# EAGLE board mouse_v6 (EAGLE 8.6.1)
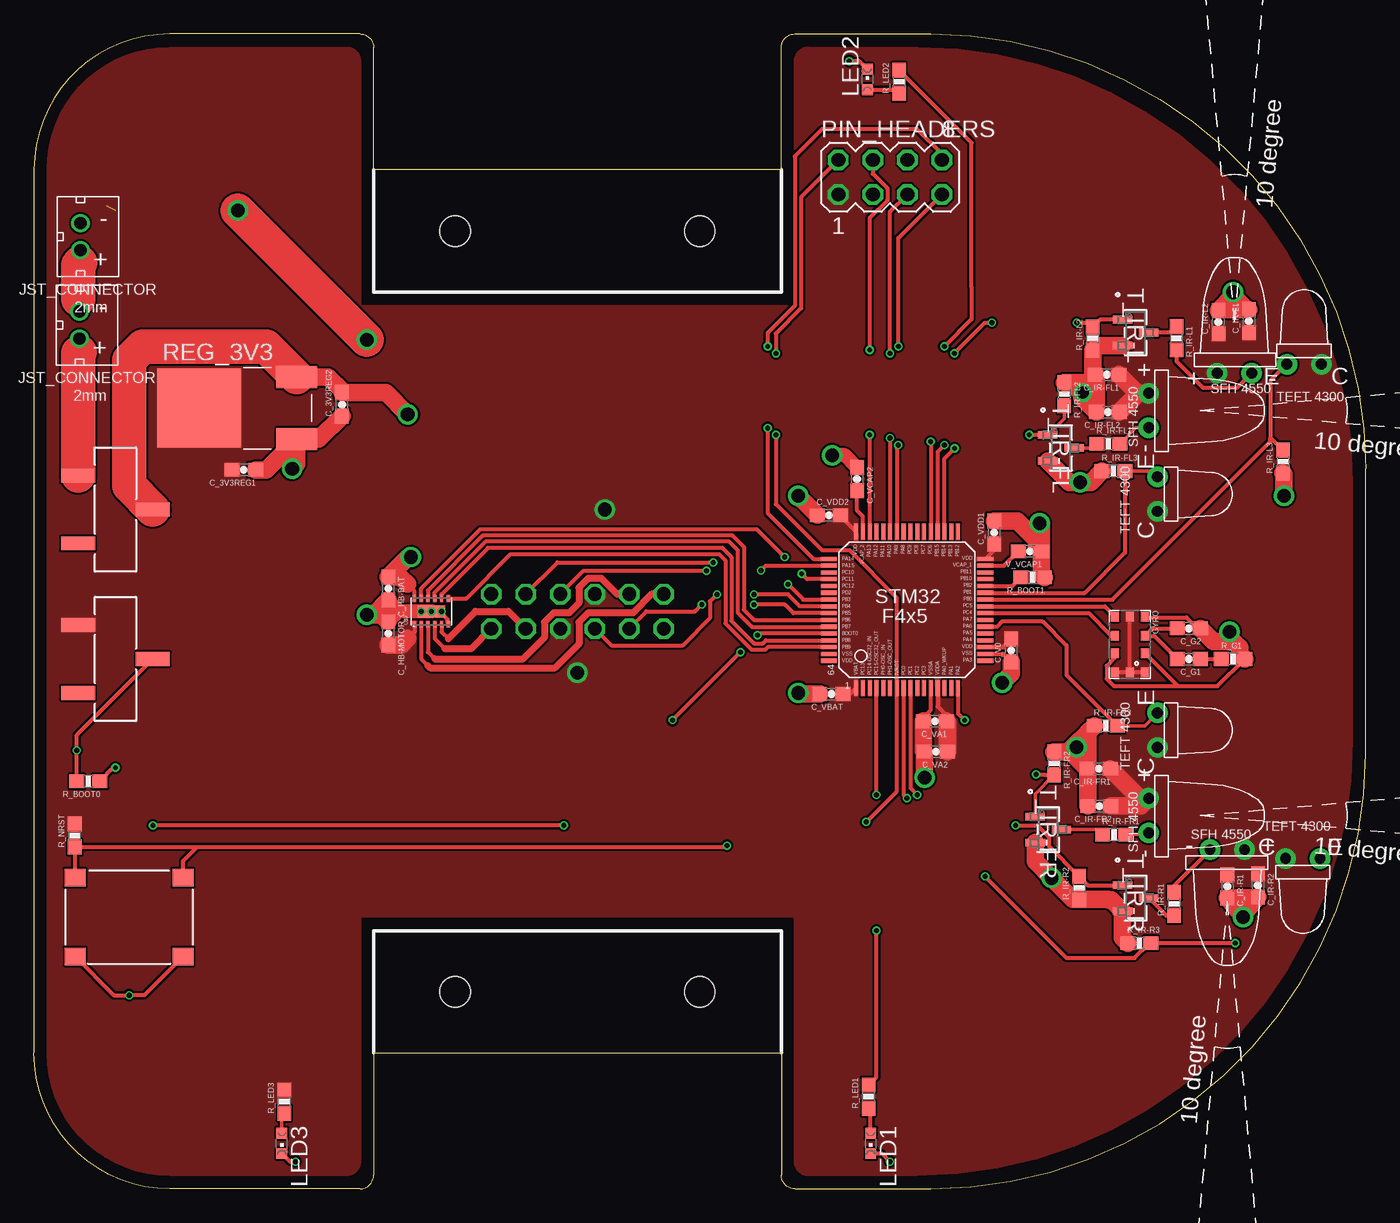
[diagram p0: board, top side]
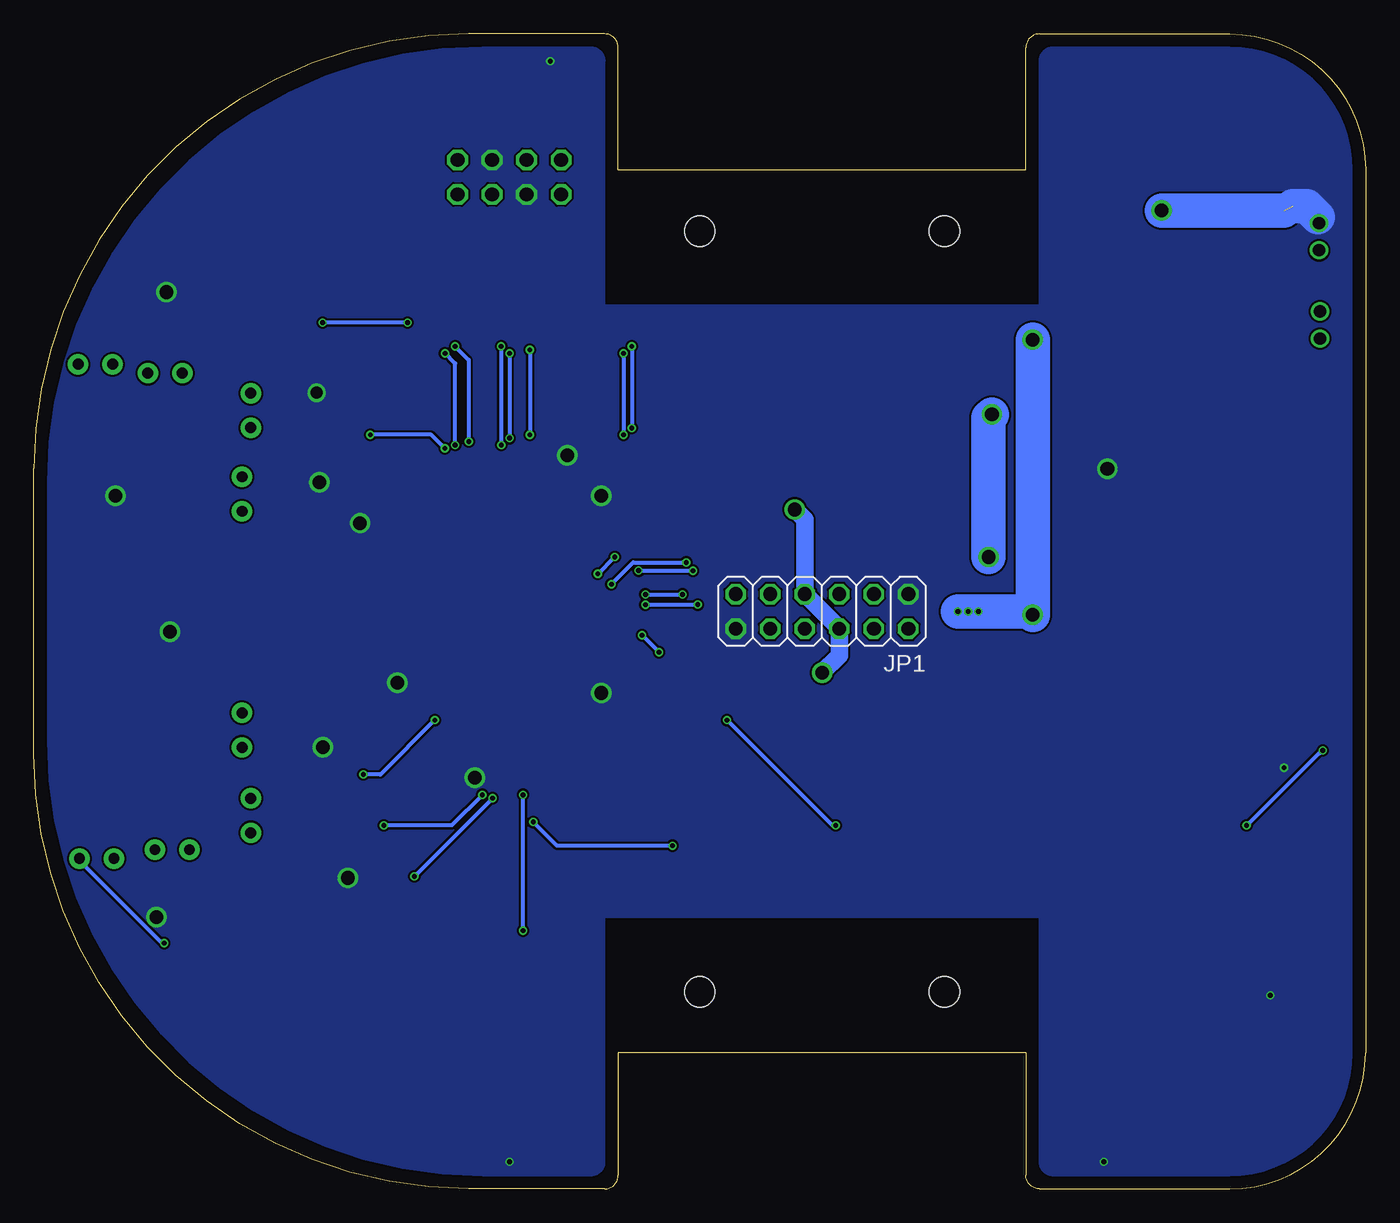
[diagram p1: board, bottom side, seen from below]

Size 98 x 85 mm. Coordinates in mm from the lower left corner, seen from the top.
Outline: 25,10 55,10 55,1 arc90 56,0 66,0 arc90 98,32 98,53 arc90 66,85 56,85 arc90 55,84 55,75 25,75 25,84 arc90 24,85 10,85 arc90 0,75 0,10 arc90 10,0 24,0 arc90 25,1 25,10
Copper layers (1*16): Top 0.035559375mm / dielectric 1.6mm / Bottom 0.035559375mm
Design rules "oshpark-2layer": minimum track width 6mil, minimum drill 10mil, track to track 6mil, track to pad 6mil, pad to pad 6mil, via to via 6mil, smd to smd 6mil, copper to edge 15mil, drill to drill 6mil, minimum pad ring 5mil, minimum via ring 5mil, stop-mask expansion 2.5mil, vias tented up to drill 0mil, thermal gap 10mil
Holes 2.25 mm at 31,14.5 49,14.5 49,70.5 31,70.5
tKeepout: area 25,66 to 55,75; area 25,10 to 55,19
bKeepout: area 25,10 to 55,19; area 25,66 to 55,75
tRestrict: area 25,10 to 55,19; area 25,66 to 55,75
bRestrict: area 25,10 to 55,19; area 25,66 to 55,75

## Footprints (pad centres in the part's own frame; a part is rotated, then mirrored left to right if it is on the bottom)
0603-CAP = smd 1.1 x 1: 1 -0.85,0; 2 0.85,0
10-TLGA = smd 0.7 x 0.6: 1 2.05,1.1; 2 0.635,1.1; 3 -0.635,1.1; 4 -2.05,1.1; 5 -2.05,0; 6 -2.05,-1.1; 7 -0.635,-1.1; 8 0.635,-1.1; 9 2.05,-1.1; 10 2.05,0
EMITTER = drill 0.8 pad 1.5: + -1.27,-0.5; - 1.27,-0.5
2X06 = drill 1.016 octagon: 1 -6.35,-1.27; 2 -6.35,1.27; 3 -3.81,-1.27; 4 -3.81,1.27; 5 -1.27,-1.27; 6 -1.27,1.27; 7 1.27,-1.27; 8 1.27,1.27; 9 3.81,-1.27; 10 3.81,1.27; 11 6.35,-1.27; 12 6.35,1.27
CHIPLED_0603 = smd 0.8 x 0.8: A 0,-0.75; C 0,0.75
MA04-2 = drill 1.016 octagon: 1 -3.81,-1.27; 2 -3.81,1.27; 3 -1.27,-1.27; 4 -1.27,1.27; 5 1.27,-1.27; 6 1.27,1.27; 7 3.81,-1.27; 8 3.81,1.27
0603-RES = smd 1.1 x 1: 1 -0.85,0; 2 0.85,0
TO-252-3 = smd 3 x 1.6: 1 4.39,-2.285; 3 4.39,2.285 | smd 6.2 x 5.8: 4 -2.79,0
SOT-23 = smd 0.559 x 1.422: 1 -0.953,-0.965; 2 0.953,-0.965; 3 0,0.965
STM32F405/415_LQFP64 = smd 1.2 x 0.3: BOOT0 -5.75,-1.75; PA3 5.75,-3.75; PA4 5.75,-2.25; PA5 5.75,-1.75; PA6 5.75,-1.25; PA7 5.75,-0.75; PA14 -5.75,3.75; PA15 -5.75,3.25; PB0 5.75,0.75; PB1 5.75,1.25; PB2 5.75,1.75; PB3 -5.75,0.75; PB4 -5.75,0.25; PB5 -5.75,-0.25; PB6 -5.75,-0.75; PB7 -5.75,-1.25; PB8 -5.75,-2.25; PB9 -5.75,-2.75; PB10 5.75,2.25; PB11 5.75,2.75; PC4 5.75,-0.25; PC5 5.75,0.25; PC10 -5.75,2.75; PC11 -5.75,2.25; PC12 -5.75,1.75; PD2 -5.75,1.25; VCAP_1 5.75,3.25; VDD_0 5.75,-2.75; VDD_1 5.75,3.75; VDD_3 -5.75,-3.75; VSS_0 5.75,-3.25; VSS_1 -5.75,-3.25 | smd 0.3 x 1.2: NRST -0.75,-5.75; PA0_WKUP 2.75,-5.75; PA1 3.25,-5.75; PA2 3.75,-5.75; PA8 -0.25,5.75; PA9 -0.75,5.75; PA10 -1.25,5.75; PA11 -1.75,5.75; PA12 -2.25,5.75; PA13 -2.75,5.75; PB12 3.75,5.75; PB13 3.25,5.75; PB14 2.75,5.75; PB15 2.25,5.75; PC0 -0.25,-5.75; PC1 0.25,-5.75; PC2 0.75,-5.75; PC3 1.25,-5.75; PC6 1.75,5.75; PC7 1.25,5.75; PC8 0.75,5.75; PC9 0.25,5.75; PC13 -3.25,-5.75; PC14 -2.75,-5.75; PC15 -2.25,-5.75; PH0 -1.75,-5.75; PH1 -1.25,-5.75; VBAT -3.75,-5.75; VCAP_2 -3.25,5.75; VDD_2 -3.75,5.75; VDDA 2.25,-5.75; VSSA 1.75,-5.75
JST_CONNECTOR_FEMALE = drill 0.889: + 0,1; - 0,-1
RECEIVER = drill 0.8 pad 1.5: C 1.27,-0.5; E -1.27,-0.5
SPLITTER = smd 0.102 x 0.102: 1 0,0; 2 0,0
12-WFDFN = smd 0.5 x 0.25: 1 -0.95,1.25; 2 -0.95,0.75; 3 -0.95,0.25; 4 -0.95,-0.25; 5 -0.95,-0.75; 6 -0.95,-1.25; 7 0.95,-1.25; 8 0.95,-0.75; 9 0.95,-0.25; 10 0.95,0.25; 11 0.95,0.75; 12 0.95,1.25 | smd 0.9 x 2: 13 0,0
SMD_SWITCH = smd 1 x 2.5: 1 -2.5,-2.75; 2 0,2.75; 3 2.5,-2.75
SMD_BUTTON = smd 1.55 x 1.3: 1 -3.975,2.9; 2 3.975,2.9; 3 -3.975,-2.9; 4 3.975,-2.9

## Placement (x,y rotation side)
C_3V3REG1  10uF  [0603-CAP]  15.45,52.92 180 top
C_3V3REG2  0.1uF  [0603-CAP]  22.67,57.74 90 top
C_G1  470nF  [0603-CAP]  85,39 180 top
C_G2  10nF  [0603-CAP]  85,41.25 180 top
C_HB-BAT  0.1uF  [0603-CAP]  26.08,44.19 270 top
C_HB-MOTOR  0.1uF  [0603-CAP]  26.08,40.89 270 top
C_IR-FL1  0.1uF  [0603-CAP]  78.98,59.92 180 top
C_IR-FL2  4.7uF  [0603-CAP]  79.04,57.17 180 top
C_IR-FR1  0.1uF  [0603-CAP]  78.36,30.92 180 top
C_IR-FR2  4.7uF  [0603-CAP]  78.42,28.17 180 top
C_IR-L1  0.1uF  [0603-CAP]  89.42,63.86 90 top
C_IR-L2  4.7uF  [0603-CAP]  87.17,63.8 90 top
C_IR-R1  0.1uF  [0603-CAP]  87.83,22.26 270 top
C_IR-R2  4.7uF  [0603-CAP]  90.08,22.32 270 top
C_V0  0.1uF  [0603-CAP]  71.92,39.62 90 top
C_VA1  0.1uF  [0603-CAP]  66.31,34.42 180 top
C_VA2  4.7uF  [0603-CAP]  66.37,32.17 180 top
C_VBAT  0.1uF  [0603-CAP]  58.68,36.42 180 top
C_VCAP2  2.2uF  [0603-CAP]  60.58,52.24 270 top
C_VDD1  0.1uF  [0603-CAP]  70.67,48.31 90 top
C_VDD2  0.1uF  [0603-CAP]  58.5,49.58 0 top
GYRO  LY3200ALH  [10-TLGA]  80.65,40.07 270 top
IR_FL  EMITTER  [EMITTER]  82.54,57.29 270 top
IR_FR  EMITTER  [EMITTER]  82.54,27.47 270 top
IR_L  EMITTER  [EMITTER]  88.35,60.54 0 top
IR_R  EMITTER  [EMITTER]  87.83,24.46 180 top
JP1  [2X06]  40,42.5 180 bottom
LED1  BLUE  [CHIPLED_0603]  61.58,3.35 180 top
LED2  RED  [CHIPLED_0603]  61.34,81.65 0 top
LED3  GREEN  [CHIPLED_0603]  18.24,3.35 180 top
PIN_HEADERS  [MA04-2]  63.01,74.46 0 top
R_BOOT0  10K  [0603-RES]  4,30 180 top
R_BOOT1  10K  [0603-RES]  73.5,45 180 top
R_G1  10K  [0603-RES]  88.25,39 0 top
R_IR-FL1  15  [0603-RES]  79.07,54.83 0 top
R_IR-FL2  47K  [0603-RES]  75.83,58.49 270 top
R_IR-FL3  1.8K  [0603-RES]  79.45,52.83 0 top
R_IR-FR1  15  [0603-RES]  79.5,26.08 0 top
R_IR-FR2  47K  [0603-RES]  75.08,31.31 270 top
R_IR-FR3  1.8K  [0603-RES]  78.88,34.08 0 top
R_IR-L1  15  [0603-RES]  84.08,62.6 270 top
R_IR-L2  47K  [0603-RES]  77.92,62.59 90 top
R_IR-L3  1.8K  [0603-RES]  91.92,53.53 90 top
R_IR-R1  15  [0603-RES]  83.92,20.97 90 top
R_IR-R2  47K  [0603-RES]  76.92,22.16 90 top
R_IR-R3  1.8K  [0603-RES]  81.35,18.08 0 top
R_LED1  100  [0603-RES]  61.42,6.79 90 top
R_LED2  330  [0603-RES]  63.67,81.48 90 top
R_LED3  330  [0603-RES]  18.42,6.42 90 top
R_NRST  10K  [0603-RES]  3,26 90 top
REG_3V3  MC33269  [TO-252-3]  14.95,57.46 0 top
T_IR-FL  MMBF170LT1G  [SOT-23]  75.58,54.53 270 top
T_IR-FR  MMBF170LT1G  [SOT-23]  74.65,26.44 270 top
T_IR-L  MMBF170LT1G  [SOT-23]  81.08,63.02 270 top
T_IR-R  MMBF170LT1G  [SOT-23]  81.08,21.4 270 top
U$1  STM32F405/415_LQFP64  [STM32F405/415_LQFP64]  64.26,42.62 0 top
U$2  JST_CONNECTOR_FEMALE  [JST_CONNECTOR_FEMALE]  3.42,70.08 180 top
U$3  JST_CONNECTOR_FEMALE  [JST_CONNECTOR_FEMALE]  3.35,63.58 180 top
U$4  RECEIVER  [RECEIVER]  93.48,61.19 0 top
U$5  RECEIVER  [RECEIVER]  83.19,51.14 270 top
U$6  RECEIVER  [RECEIVER]  83.19,33.76 270 top
U$7  RECEIVER  [RECEIVER]  93.38,23.81 180 top
U$8  SPLITTER  [SPLITTER]  5.34,72.31 0 bottom
U$9  DRV8835  [12-WFDFN]  29.25,42.5 90 top
U$10  SMD_SWITCH  [SMD_SWITCH]  6,50 270 top
U$11  SMD_SWITCH  [SMD_SWITCH]  6,39 270 top
U$12  SMD_BUTTON  [SMD_BUTTON]  7,20 0 top
V_VCAP1  2.2uF  [0603-CAP]  73.3,46.92 180 top

## Library data of the parts
C_3V3REG1 C_3V3REG2 C_G1 C_G2 C_HB-BAT C_HB-MOTOR C_IR-FL1 C_IR-FL2 C_IR-FR1 C_IR-FR2 C_IR-L1 C_IR-L2 C_IR-R1 C_IR-R2 C_V0 C_VA1 C_VA2 C_VBAT C_VCAP2 C_VDD1 C_VDD2 V_VCAP1 = SparkFun
GYRO = LY3200ALH
IR_FL IR_FR IR_L IR_R U$4-U$7 = sfh4550 _ teft4300
JP1 = pinhead
LED1-LED3 = led
PIN_HEADERS = con-lstb; OC_FARNELL: unknown; OC_NEWARK: unknown
R_BOOT0 R_BOOT1 R_G1 R_IR-FL1-R_IR-FL3 R_IR-FR1-R_IR-FR3 R_IR-L1-R_IR-L3 R_IR-R1-R_IR-R3 R_LED1-R_LED3 R_NRST = SparkFun-Resistors; PROD_ID: RES-09119
REG_3V3 = MC33269
T_IR-FL T_IR-FR T_IR-L T_IR-R = MMBF170LT1; MANUFACTURER_PART_NUMBER: MMBF170LT1G; VENDOR: ON Semiconductor
U$1 = STM32F10x F4xx
U$2 U$3 = JST_CONNECTOR_FEMALE. through hole
U$8 = splitter
U$9 = DRV8835
U$10-U$12 = switches

## Nets
3V3: C_3V3REG1.2 C_HB-MOTOR.2 C_IR-FL1.1 C_IR-FL2.1 C_IR-FR1.1 C_IR-FR2.1 C_IR-L1.1 C_IR-L2.1 C_IR-R1.1 C_IR-R2.1 C_V0.2 C_VA1.1 C_VA2.1 C_VBAT.1 C_VDD1.1 C_VDD2.2 GYRO.1 GYRO.5 GYRO.9 GYRO.10 IR_FL.+ IR_FR.+ IR_L.+ IR_R.+ JP1.6 JP1.7 PIN_HEADERS.1 R_LED3.2 R_NRST.2 REG_3V3.4 U$1.VBAT U$1.VDD_0 U$1.VDD_1 U$1.VDD_2 U$1.VDDA U$4.C U$5.C U$6.C U$7.C U$9.1 U$11.1
BAT: C_3V3REG2.2 C_HB-BAT.1 REG_3V3.3 U$9.12 U$10.2
BOOT0: R_BOOT0.2 U$1.BOOT0 U$11.2
BOOT1: R_BOOT1.2 U$1.PB2
EMIT_FL: R_IR-FL2.2 T_IR-FL.1 U$1.PB14
EMIT_FR: R_IR-FR2.2 T_IR-FR.1 U$1.PA2
EMIT_L: R_IR-L2.2 T_IR-L.1 U$1.PB15
EMIT_R: R_IR-R2.2 T_IR-R.1 U$1.PC1
ENC_A1: JP1.5 U$1.PA15
ENC_A2: JP1.8 U$1.PB4
ENC_B1: JP1.3 U$1.PB3
ENC_B2: JP1.10 U$1.PB5
GND: C_3V3REG1.1 C_3V3REG2.1 C_G2.1 C_IR-FL1.2 C_IR-FL2.2 C_IR-FR1.2 C_IR-FR2.2 C_IR-L1.2 C_IR-L2.2 C_IR-R1.2 C_IR-R2.2 C_V0.1 C_VA1.2 C_VA2.2 C_VBAT.2 C_VCAP2.1 C_VDD1.2 C_VDD2.1 GYRO.2 GYRO.4 GYRO.8 JP1.1 JP1.12 LED1.C LED2.C LED3.C PIN_HEADERS.3 PIN_HEADERS.6 R_BOOT0.1 R_BOOT1.1 R_G1.2 R_IR-FL2.1 R_IR-FL3.1 R_IR-FR2.1 R_IR-FR3.1 R_IR-L2.1 R_IR-L3.1 R_IR-R2.1 R_IR-R3.1 REG_3V3.1 T_IR-FL.2 T_IR-FR.2 T_IR-L.2 T_IR-R.2 U$1.VSS_0 U$1.VSSA U$2.- U$8.2 U$12.3 U$12.4 V_VCAP1.1
GYRO: GYRO.6 U$1.PC5
HB_B1: U$1.PB7 U$9.9
HB_B2: U$1.PB9 U$9.7
HB_F1: U$1.PB6 U$9.10
HB_F2: U$1.PB8 U$9.8
HB_MODE: U$1.PC11 U$9.11
LED1: R_LED1.2 U$1.PC15
LED2: R_LED2.2 U$1.PC6
M_B1: JP1.9 U$9.3
M_B2: JP1.4 U$9.5
M_F1: JP1.11 U$9.2
M_F2: JP1.2 U$9.4
MGND: C_HB-BAT.2 C_HB-MOTOR.1 U$8.1 U$9.6 U$9.13
N$2: C_VCAP2.2 U$1.VCAP_2
N$3: U$2.+ U$3.-
N$4: U$1.VCAP_1 V_VCAP1.2
N$5: C_G1.1 R_G1.1
N$6: U$3.+ U$10.1
N$7: IR_FR.- R_IR-FR1.2
N$8: LED1.A R_LED1.1
N$9: C_G1.2 C_G2.2 GYRO.3
N$10: LED2.A R_LED2.1
N$11: LED3.A R_LED3.1
N$12: R_IR-FR1.1 T_IR-FR.3
N$15: IR_R.- R_IR-R1.2
N$17: IR_FL.- R_IR-FL1.2
N$22: R_IR-FL1.1 T_IR-FL.3
N$23: R_IR-R1.1 T_IR-R.3
N$24: IR_L.- R_IR-L1.2
N$25: R_IR-L1.1 T_IR-L.3
NRST: PIN_HEADERS.2 R_NRST.1 U$1.NRST U$12.1 U$12.2
REC_FL: R_IR-FL3.2 U$1.PB1 U$5.E
REC_FR: R_IR-FR3.2 U$1.PA6 U$6.E
REC_L: R_IR-L3.2 U$1.PB0 U$4.E
REC_R: R_IR-R3.2 U$1.PC0 U$7.E
RX: PIN_HEADERS.5 U$1.PA10
SWCLK: PIN_HEADERS.8 U$1.PA14
SWDIO: PIN_HEADERS.4 U$1.PA13
TX: PIN_HEADERS.7 U$1.PA9
VREF_G: GYRO.7 U$1.PC4

## Tracks (layer width: path | path; a pad name or v marks a point on that pad's centre or on a via)
3V3  (via drill 1)
  Top 0.305: U$1.VDD_1 70.67,47.03 C_VDD1.1 | U$1.VDD_0 71.32,39.87 C_V0.2 | C_VBAT.1 60.06,36.42 U$1.VBAT | C_VDD2.2 59.8,49.08 U$1.VDD_2 | U$1.VDDA 66.51,35.49 67.16,34.84 C_VA1.1 | GYRO.1 GYRO.10 | GYRO.10 GYRO.9 | GYRO.10 GYRO.5 | U$9.1 28,41 27.5,40.5
  Top 1.27: C_VA1.1 67.22,34.36 C_VA2.1 | C_IR-FR1.1 81.39,28.74 IR_FR.+ 81.47,28.17 C_IR-FR2.1 | C_IR-FL2.1 81.28,58.56 | 81.28,58.56 IR_FL.+ | C_IR-FL1.1 81.19,58.56 81.28,58.56 | 27.5,40.5 27.04,40.04 C_HB-MOTOR.2
  Bottom 1.27: v40,38 38.73,39.27 JP1.6 JP1.7 41.27,49.27 v42,50
  pour Top (no thermals): 65,84 arc-90 97,52 97,33 arc-90 65,1 57,1 arc-90 56,2 56,20 24,20 24,2 arc-90 23,1 10,1 arc-90 1,10 1,75 arc-90 10,84 23,84 arc-90 24,83 24,65 56,65 56,83 arc-90 57,84
BAT  (via drill 1)
  Top 0.305: U$9.12 28,44 27.5,44.5
  Top 1.27: 19.18,59.74 REG_3V3.3 21.66,59.74 22.67,58.74 C_3V3REG2.2 25.91,58.59 v27.5,57 | 27.5,44.5 26.96,45.04 C_HB-BAT.1 27.54,46.5 v27.75,46.5
  Top 2.54: REG_3V3.3 17.09,62 8,62 7,61 7,51.75 U$10.2
  Bottom 2.54: v27.75,46.5 27.75,56.75 v27.5,57
BOOT0  (via drill 0.35)
  Top 0.305: R_BOOT0.2 v3.15,32.27 3.15,33.4 U$11.2 | U$1.BOOT0 53.37,40.87 v53.25,40.75 | v52,39.5 v47,34.5 | v39,26.75 v8.75,26.75
  Bottom 0.305: v53.25,40.75 v52,39.5 | v47,34.5 39.25,26.75 v39,26.75 | v8.75,26.75 3.42,32.08 3.34,32.08 v3.15,32.27
BOOT1
  Top 0.305: U$1.PB2 72.02,44.37 R_BOOT1.2
EMIT_FL  (via drill 0.35)
  Top 0.254: T_IR-FL.1 75.83,56.7 R_IR-FL2.2
  Top 0.305: v67.76,54.5 67.01,53.75 U$1.PB14 | v73.25,55.5 74.6,55.5 T_IR-FL.1
  Bottom 0.305: v67.76,54.5 68.76,55.5 v73.25,55.5
EMIT_FR  (via drill 0.35)
  Top 0.254: R_IR-FR2.2 73.69,29.07 T_IR-FR.1
  Top 0.305: R_IR-FR2.2 74.42,30.46 74.38,30.5 v73.75,30.5 | U$1.PA2 68.01,35.05 68.02,35.05 68.02,34.98 v68.5,34.5
  Bottom 0.305: v68.5,34.5 72.5,30.5 v73.75,30.5
EMIT_L  (via drill 0.35)
  Top 0.305: T_IR-L.1 78.45,63.97 R_IR-L2.2 77.61,63.75 v76.75,63.75 | U$1.PB15 66.51,54.26 v67,54.75 | v67.75,61.5 70,63.75 v70.5,63.75
  Bottom 0.305: v67,54.75 67,60.75 v67.75,61.5 | v70.5,63.75 v76.75,63.75
EMIT_R  (via drill 0.35)
  Top 0.305: T_IR-R.1 77.58,22.35 R_IR-R2.2 74.7,25.23 74.7,25.89 73.84,26.75 v72.25,26.75 | v65,29 64.51,29.49 U$1.PC1
  Bottom 0.305: v65,29 67.25,26.75 v72.25,26.75
ENC_A1  (via drill 0.35)
  Top 0.305: v53.5,45.5 53.87,45.87 U$1.PA15 | JP1.5 40.46,45.5 v49.5,45.5
  Bottom 0.305: v53.5,45.5 50.25,45.5 v49.5,45.5
ENC_A2  (via drill 0.35)
  Top 0.305: JP1.8 42.5,40 47.75,40 49.75,42 49.75,43.23 v50.27,43.75 | U$1.PB4 56.38,42.87 55.5,43.75 v53,43.75
  Bottom 0.305: v53,43.75 v50.27,43.75
ENC_B1  (via drill 0.35)
  Top 0.305: JP1.3 38.52,46.1 v50,46.1 | v55.5,44.5 56.63,43.37 U$1.PB3
  Bottom 0.305: v55.5,44.5 53.89,46.11 50.25,46.11 50.25,46.1 v50,46.1
ENC_B2  (via drill 0.35)
  Top 0.305: JP1.10 45.08,42.5 48.64,42.5 v49.14,43 | U$1.PB5 55.88,42.37 55.26,42.99 v53,42.99
  Bottom 0.305: v53,42.99 v49.15,42.99 v49.14,43
GND  (via drill 0.35, 0.9, 1)
  Top 0.305: U$1.VSS_0 71.32,39.37 C_V0.1 | C_G2.1 85.63,41.25 84.83,42.05 81.81,42.05 GYRO.4 | GYRO.8 79.55,39.1 78.94,38.5 78.94,37.54 79.49,37 84.19,37 | R_G1.2 87.1,37 84.19,37 | GYRO.2 84.19,37 | C_VA1.2 65.46,34.71 66.01,35.26 U$1.VSSA | LED1.C 62.4,2.6 v63,2 | LED2.C 60.74,83 v60,83 | R_BOOT0.1 5.85,31 v6,31 | LED3.C 18.84,2 v19.25,2 | U$12.4 8.12,14.25 v7,14.25 5.88,14.25 U$12.3
  Top 1.016: C_VCAP2.1 59.67,54 v58.75,54
  Top 1.27: C_IR-FR2.2 77.57,30.86 | 77.57,30.86 C_IR-FR1.2 | T_IR-FL.2 76.19,52 v77,52 77.77,52 R_IR-FL3.1 | R_BOOT1.1 74.15,45.2 V_VCAP1.1 | C_VA1.2 65.46,32.23 C_VA2.2 65.52,30.3 v65.56,30.25 | C_3V3REG2.1 20.95,55.17 REG_3V3.1 | C_3V3REG1.1 17.09,52.92 REG_3V3.1 | REG_3V3.1 19.34,53.34 v19,53 | T_IR-L.2 78.25,62.07 R_IR-L2.1 77.92,60.13 C_IR-FL1.2 | 78.19,59.86 C_IR-FL2.2 77.12,58.24 77.12,58.52 76.29,59.34 R_IR-FL2.1 77.67,59.34 78.19,59.86 | 78.19,59.86 C_IR-FL1.2 | C_IR-FL1.2 78.13,59.53 v77.2,58.6 | 88.25,65.73 C_IR-L2.2 87.23,64.71 C_IR-L1.2 89.27,64.71 88.25,65.73 | 88.25,65.73 v88.25,66 | R_IR-L3.1 92,52.6 v92,51 | C_G2.1 86.81,40.29 88.28,40.29 | 88.28,40.29 88.74,39.83 88.74,39.36 R_G1.2 | 88.28,40.29 88,40.56 v88,41 | C_IR-FR1.2 76.27,32.16 R_IR-FR2.1 76.11,32.16 R_IR-FR3.1 77.57,33.62 77.57,30.86 | C_IR-FR1.2 77.51,31.74 v76.75,32.5 | v88.99,20 C_IR-R1.2 90.02,21.41 C_IR-R2.2 88.99,20.13 v88.99,20 | v88.99,20 v89,20 | R_IR-R3.1 80.11,18.46 T_IR-R.2 79.28,21.29 79.08,21.29 79.05,21.31 R_IR-R2.1 76.46,21.31 v74.88,22.88 73.69,24.08 T_IR-FR.2 | V_VCAP1.1 73.79,47.28 73.79,47.75 72.37,49.16 C_VDD1.2 | V_VCAP1.1 74.15,48.85 v74,49 | C_VDD2.1 56.98,50.25 v56.25,51 | C_V0.1 71.92,37.92 v71.25,37.25 | C_VBAT.2 56.33,36.42 v56.25,36.5
  Bottom 1.27: 3.5,71.5 3.5,71.16 U$2.-
  Bottom 2.54: 4.65,72.31 U$8.2 4.31,72.31 3.5,71.5
  pour Bottom (no thermals): 65,84 arc-90 97,52 97,33 arc-90 65,1 57,1 arc-90 56,2 56,20 24,20 24,2 arc-90 23,1 10,1 arc-90 1,10 1,75 arc-90 10,84 23,84 arc-90 24,83 24,65 56,65 56,83 arc-90 57,84
GYRO
  Top 0.305: U$1.PC5 78.8,42.87 GYRO.6
HB_B1
  Top 0.305: U$9.9 29.5,43.9 33.22,47.62 51.17,47.62 51.79,47 51.79,42.43 52.85,41.37 U$1.PB7
HB_B2
  Top 0.305: U$9.7 31.82,43.45 35.08,46.71 50.42,46.71 50.88,46.25 50.88,41.62 52.81,39.69 53.83,39.69 54.02,39.87 U$1.PB9
HB_F1
  Top 0.305: U$9.10 29,44.05 33.03,48.08 51.42,48.08 52.25,47.25 52.25,42.62 53,41.87 U$1.PB6
HB_F2
  Top 0.305: U$9.8 30,43.76 33.41,47.17 50.67,47.17 51.34,46.5 51.34,41.81 53,40.14 53.64,40.14 53.87,40.37 U$1.PB8
HB_MODE  (via drill 0.35)
  Top 0.305: U$1.PC11 56.89,44.87 v56.5,45.26 | U$9.11 28.5,44.2 32.84,48.54 53.21,48.54 v55.25,46.5
  Bottom 0.305: v56.5,45.26 55.26,46.5 v55.25,46.5
LED1  (via drill 0.35)
  Top 0.305: v62,29 U$1.PC15 | R_LED1.2 62,8.22 v62,19
  Bottom 0.305: v62,19 v62,29
LED2  (via drill 0.35)
  Top 0.305: v67,62 69.01,64.01 69.01,66 69.01,66.35 69.01,76.99 R_LED2.2 | v66,55 U$1.PC6
  Bottom 0.305: v67,62 66,61 v66,55
M_B1
  Top 0.305: U$9.3 29,39.5 29.5,39
  Top 0.508: JP1.9 42.92,43.77 41.75,44.94 40.79,44.94 40.1,44.25 40.1,43.1 39.4,42.4 38.25,42.4 37.56,41.71 37.56,40.56 36,39 29.5,39
M_B2
  Top 0.305: U$9.5 30,41 30.5,40.5
  Top 0.508: JP1.4 34.92,42.5 32.5,42.5 30.5,40.5
M_F1
  Top 0.305: U$9.2 28.5,39 29,38.5
  Top 0.508: JP1.11 45.46,43.77 44.09,42.4 40.79,42.4 40.1,41.71 40.1,40.1 38.34,38.34 29.16,38.34 29,38.5
M_F2
  Top 0.305: U$9.4 29.5,40.5 30.25,39.75
  Top 0.508: JP1.2 32.17,39.75 30.25,39.75
MGND  (via drill 0.35, 1)  (1 unrouted)
  Top 0.305: U$9.6 30.46,41.59 30.46,41.9 29.86,42.5 v30,42.5 U$9.13
  Top 1.016: v28.5,42.5 26.92,42.5 C_HB-BAT.2 | U$9.13 v28.5,42.5 | v28.5,42.5 26.84,42.5 C_HB-MOTOR.1
  Top 1.27: C_HB-BAT.2 24.99,42.25 | 24.99,42.25 v24.5,42.25 | C_HB-MOTOR.1 25.57,42.25 24.99,42.25
  Top 2.54: v15,72 v24.5,62.5
  Bottom 2.54: v24.5,62.5 v24.5,42.25 24.75,42.5 v28.5,42.5 U$9.13 v30,42.5 | v15,72 6,72
  other vias: 29.25,42.5
N$2
  Top 0.305: U$1.VCAP_2 61.01,49.49 60.58,49.92 C_VCAP2.2
N$3
  Top 1.27: U$2.+ 3.42,68.17 | U$3.- 3.25,64.68 3.25,65.5
  Top 2.54: 3.25,65.5 3.25,68 3.42,68.17
N$4
  Top 0.305: U$1.VCAP_1 71.4,45.87 V_VCAP1.2
N$5
  Top 0.305: C_G1.1 R_G1.1
N$6
  Top 1.27: U$3.+ 3.35,61.6 | 3.25,57.58 3.25,57.75
  Top 2.54: 3.35,61.6 3.25,61.5 3.25,57.58 U$10.1
N$7
  Top 0.254: R_IR-FR1.2 81.92,26.08 IR_FR.-
N$8
  Top 0.305: 61.67,4.19 LED1.A | 61.58,4.4 LED1.A | LED1.A 61.58,5.78 R_LED1.1
N$9
  Top 0.305: C_G2.2 82.3,41.25 GYRO.3 82.44,40.7 C_G1.2
N$10
  Top 0.305: LED2.A 63.4,80.9 R_LED2.1
N$11
  Top 0.254: LED3.A 18.24,5.39 R_LED3.1
N$12
  Top 0.254: R_IR-FR1.1 78.29,26.44 T_IR-FR.3
N$15
  Top 0.305: IR_R.- 83.92,22.32 R_IR-R1.2
N$17
  Top 0.254: R_IR-FL1.2 81.11,56.02 IR_FL.-
N$22
  Top 0.254: T_IR-FL.3 77.92,54.53 R_IR-FL1.1
N$23
  Top 0.305: T_IR-R.3 83.33,20.12 R_IR-R1.1
N$24
  Top 0.305: R_IR-L1.2 84.08,60.92 86.02,58.98 88.56,58.98 IR_L.-
N$25
  Top 0.305: R_IR-L1.1 83.65,63.02 T_IR-L.3
NRST  (via drill 0.35)
  Top 0.305: R_NRST.1 2.93,25.08 | v54.61,61.5 54.61,62.96 56.46,64.81 56.46,72.99 PIN_HEADERS.2 | v54.61,55.5 54.61,50.39 58,47 60,47 63.51,43.49 U$1.NRST 63.51,29.26 v61.25,27 | R_NRST.1 12,25.15 | 12,25.15 50.9,25.15 v51,25.25 | U$12.1 3.02,25.12 R_NRST.1 | U$12.2 10.97,24.12 12,25.15
  Bottom 0.305: v54.61,61.5 v54.61,55.5 | v51,25.25 59.5,25.25 v61.25,27
REC_FL
  Top 0.254: R_IR-FL3.2 82.27,52.83 U$5.E
  Top 0.305: U$1.PB1 77.34,43.87 80.3,46.83 R_IR-FL3.2
REC_FR
  Top 0.254: R_IR-FR3.2 81.74,34.08 U$6.E
  Top 0.305: U$1.PA6 70.87,41.37 71.25,41.75 74.25,41.75 76,40 76,37.81 R_IR-FR3.2
REC_L
  Top 0.305: U$4.E 91,59.48 91,55.3 | 91,55.3 R_IR-L3.2 | U$1.PB0 79.37,43.37 91,55 91,55.3
REC_R  (via drill 0.35)
  Top 0.305: v88.42,18.08 R_IR-R3.2 | R_IR-R3.2 81.98,18.08 | U$1.PC0 64.01,28.98 v64.24,28.75 | R_IR-R3.2 82.08,18.08 81,17 76,17 v70,23
  Bottom 0.305: v64.24,28.75 v69.99,23 v70,23 | v88.42,18.08 88.58,18.08 94.65,24.15 U$7.E
RX  (via drill 0.35)
  Top 0.305: PIN_HEADERS.5 63.01,71.92 v63.01,61.51 v63,61.5 | v63,55.25 U$1.PA10
  Bottom 0.305: v63,61.5 v63,55.25
SWCLK  (via drill 0.35)
  Top 0.305: U$1.PA14 57.38,46.37 54,49.75 v54,56 | PIN_HEADERS.8 66.82,76.18 65,78 58,78 56,76 56,65 54,63 v54,62
  Bottom 0.305: v54,62 v54,56
SWDIO  (via drill 0.35)
  Top 0.305: PIN_HEADERS.4 61.74,74.7 62.81,73.63 62.81,72.75 61.5,71.44 v61.5,61.75 61.55,61.8 | v61.5,55.5 U$1.PA13
  Bottom 0.305: v61.5,61.75 v61.5,55.5
TX  (via drill 0.35)
  Top 0.305: v63.63,62 v63.62,62 63.62,69.99 PIN_HEADERS.7 | v63.61,54.75 63.61,54.61 63.5,54.5 U$1.PA9
  Bottom 0.305: v63.62,62 v63.62,54.76 v63.61,54.75
VREF_G
  Top 0.305: U$1.PC4 77.63,42.37 79.3,40.7 GYRO.7